# Altium PCB PCB1.PcbDoc (part 2 of 2)
Units mm, origin at the board's own origin, x right, y up, seen from the top; angles counter-clockwise.
Board outline 148.88 x 148.12 mm, 2 copper layers (Top Layer, Bottom Layer); 121 components, 61 nets, 373 pads, 52 vias.
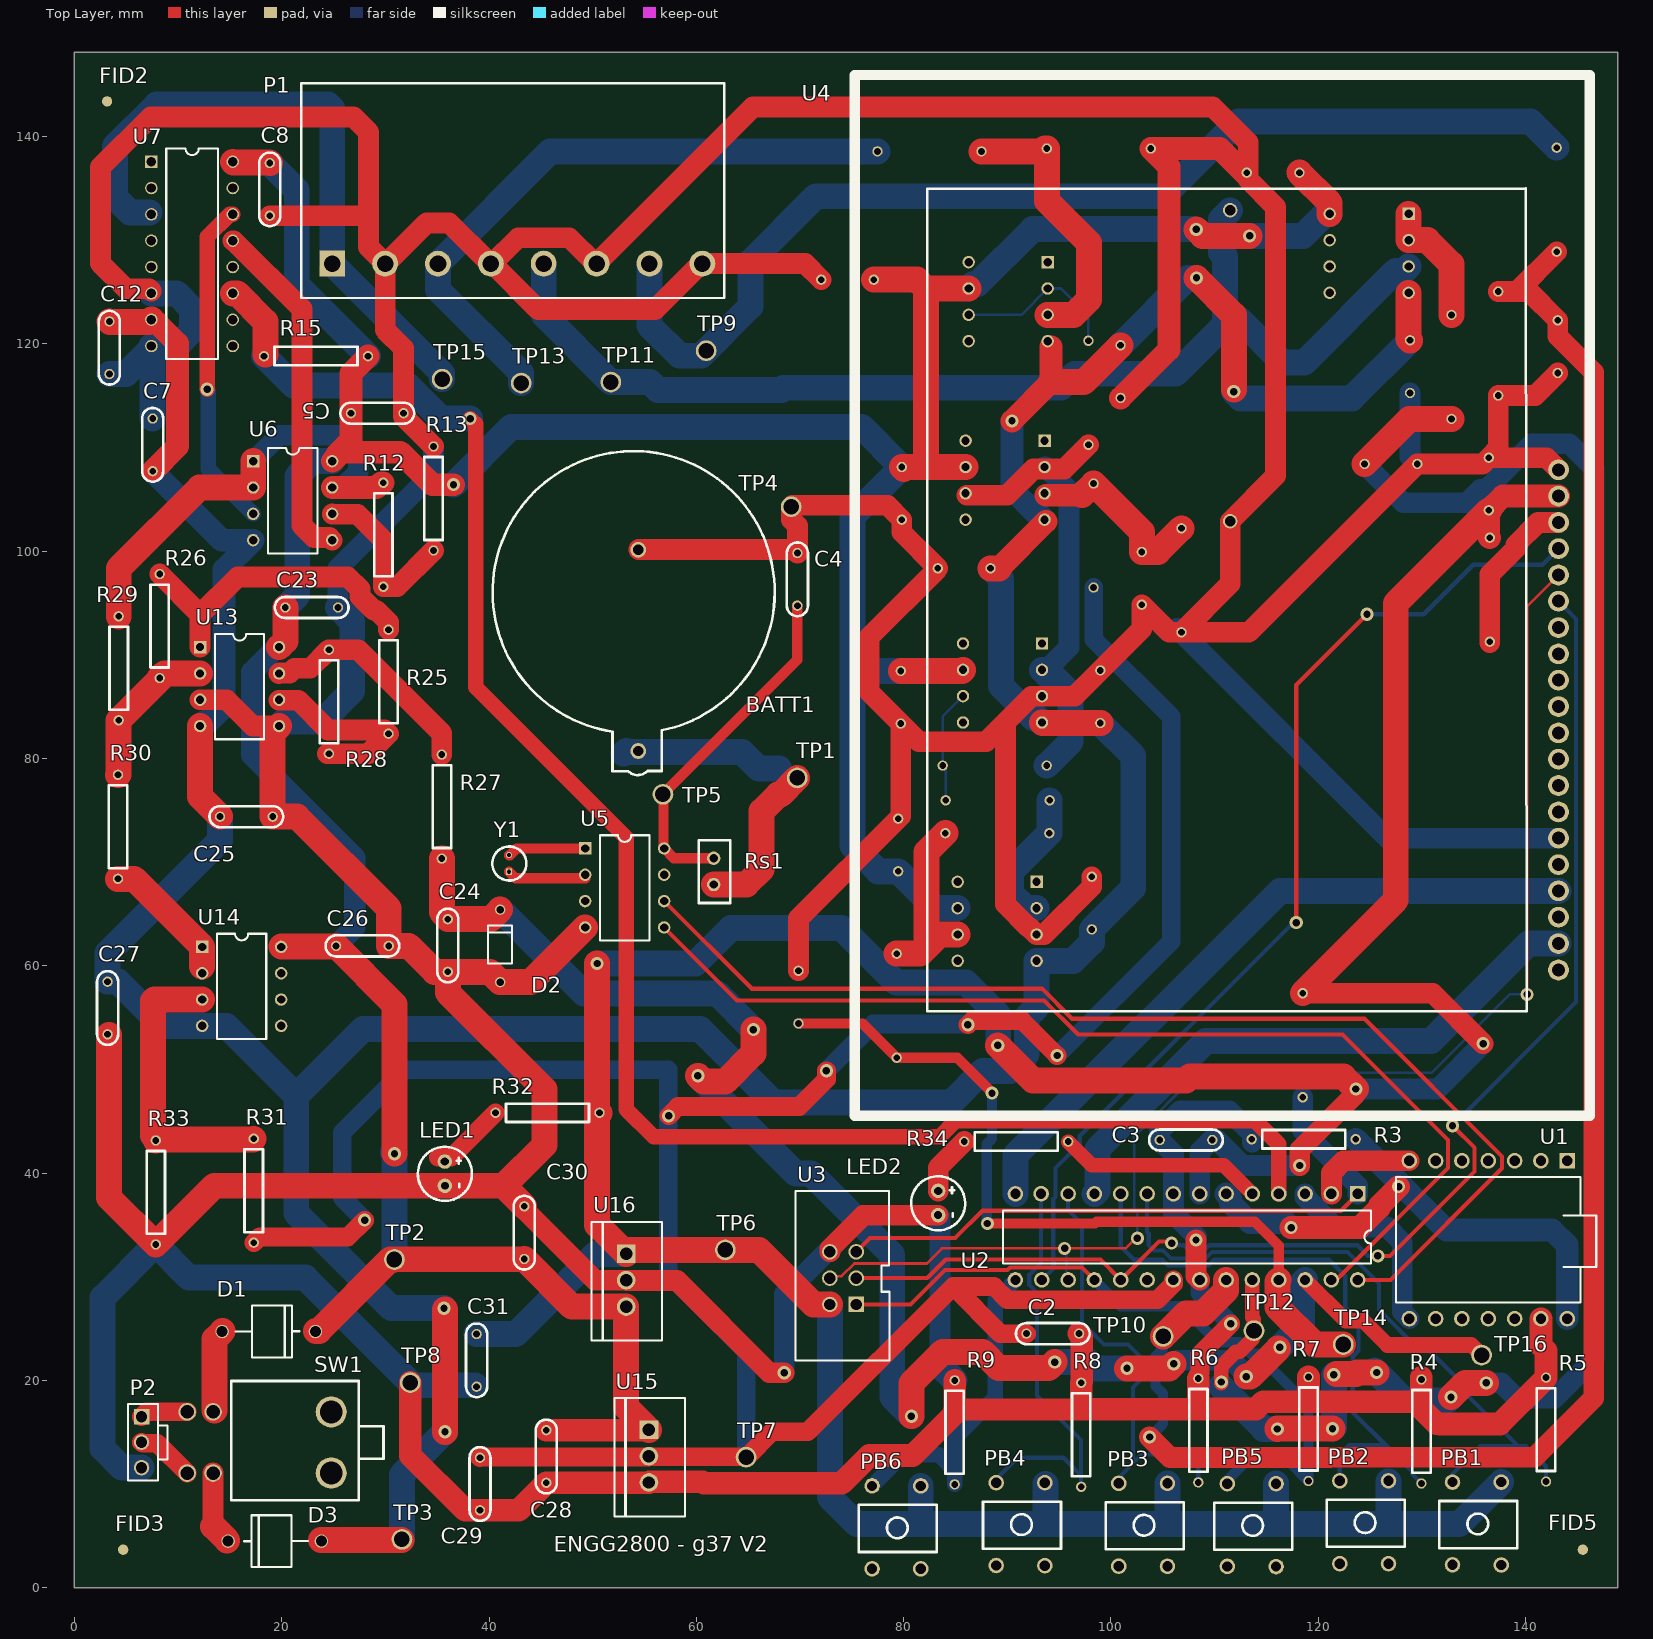
[diagram p0: Top Layer view]

## Part data (continued)
U9 U10 U11 U12: "Operational Amplifier, 1 Func, 2000uV Offset-Max, JFET, PDIP8", Ambient Temperature Range High=70°C, Case/Package=PDIP, Dual Supply Voltage=9V, Input Bias Current=50pA, Input Offset Voltage (Vos)=800µV, Manufacturer="Texas Instruments", Manufacturer Lifecycle Status=ACTIVE, Max Dual Supply Voltage=18V, Min Dual Supply Voltage=3.5V, Min Operating Temperature=0°C, Nominal Supply Current=2mA, Supplier Part Number 1=296-26079-5-ND, Voltage Gain=106.02dB, Bandwidth=3MHz, Category="Amplifiers - Op Amps, Buffer, Instrumentation", Common Mode Rejection Ratio=70dB, ComponentLink1Description=https://octopart.com:443/opatz8j6/c1?t=ME9Kw5m9dXWfcXky85tAcHSyYlC8apoAZ8-3gre8b_nSina7puu2hP8TwWnfTs3EPeSjX34nqyTitdSFLs_8QGBgHX6ww4XlTFDgyVNlqbWD734mBrk3_tKI5cnxKlAKfKpGQ4qpv40VtQydaFuTpCPyxMtPIXymfvkq-wgZ2iYYC59fUWRRvOqwP5ghjkfPHXa6W8o3ZhqP265dUXWWeYnFDnAQeTWHD9G2zSMM2k3qVNsbcUXv1JY2EX9HSKcvO5VCVgy-f0kGF7zpLYVPUm_lO1vQG-OiufpRT80XQYLiZAB9fTbyyp6S8sS6LBfEamcry8ZtT7mRzWiBFXFYfVMsnVtz1ltjCeQae7iXIE2CNjtUpcme9pxYmzJIEchvww&src-supplier=Texas+Instruments, ComponentLink1URL=https://octopart.com:443/opatz8j6/c1?t=ME9Kw5m9dXWfcXky85tAcHSyYlC8apoAZ8-3gre8b_nSina7puu2hP8TwWnfTs3EPeSjX34nqyTitdSFLs_8QGBgHX6ww4XlTFDgyVNlqbWD734mBrk3_tKI5cnxKlAKfKpGQ4qpv40VtQydaFuTpCPyxMtPIXymfvkq-wgZ2iYYC59fUWRRvOqwP5ghjkfPHXa6W8o3ZhqP265dUXWWeYnFDnAQeTWHD9G2zSMM2k3qVNsbcUXv1JY2EX9HSKcvO5VCVgy-f0kGF7zpLYVPUm_lO1vQG-OiufpRT80XQYLiZAB9fTbyyp6S8sS6LBfEamcry8ZtT7mRzWiBFXFYfVMsnVtz1ltjCeQae7iXIE2CNjtUpcme9pxYmzJIEchvww&src-supplier=Texas+Instruments, ComponentLink2Description=https://datasheet.octopart.com:443/LF411CP-Texas-Instruments-datasheet-10255057.pdf?src-supplier=Texas+Instruments, ComponentLink2URL=https://datasheet.octopart.com:443/LF411CP-Texas-Instruments-datasheet-10255057.pdf?src-supplier=Texas+Instruments, ComponentLink3Description=https://sigma.octopart.com:443/49250158/technical_drawing/Texas-Instruments-LF411CP.pdf?src-supplier=Texas+Instruments, ComponentLink3URL=https://sigma.octopart.com:443/49250158/technical_drawing/Texas-Instruments-LF411CP.pdf?src-supplier=Texas+Instruments, ComponentLink4Description=https://datasheet.octopart.com:443/LF411CP-Texas-Instruments-datasheet-152016.pdf?src-supplier=Texas+Instruments, ComponentLink4URL=https://datasheet.octopart.com:443/LF411CP-Texas-Instruments-datasheet-152016.pdf?src-supplier=Texas+Instruments, ComponentLink5Description=https://datasheet.octopart.com:443/LF411CP-Texas-Instruments-datasheet-149597787.pdf?src-supplier=Upverter, ComponentLink5URL=https://datasheet.octopart.com:443/LF411CP-Texas-Instruments-datasheet-149597787.pdf?src-supplier=Upverter, ComponentLink6Description=https://datasheet.octopart.com:443/LF411CP-Texas-Instruments-datasheet-33010185.pdf?src-supplier=Newark, ComponentLink6URL=https://datasheet.octopart.com:443/LF411CP-Texas-Instruments-datasheet-33010185.pdf?src-supplier=Newark, ComponentLink7Description=https://datasheet.octopart.com:443/LF411CP-Texas-Instruments-datasheet-29029183.pdf?src-supplier=Newark, ComponentLink7URL=https://datasheet.octopart.com:443/LF411CP-Texas-Instruments-datasheet-29029183.pdf?src-supplier=Newark, ComponentLink8Description=https://datasheet.octopart.com:443/LF411CP-Texas-Instruments-datasheet-17727392.pdf?src-supplier=Newark, ComponentLink8URL=https://datasheet.octopart.com:443/LF411CP-Texas-Instruments-datasheet-17727392.pdf?src-supplier=Newark, ComponentLink9Description=https://datasheet.octopart.com:443/LF411CP-Texas-Instruments-datasheet-20723.pdf?src-supplier=Newark, ComponentLink9URL=https://datasheet.octopart.com:443/LF411CP-Texas-Instruments-datasheet-20723.pdf?src-supplier=Newark, ComponentLink10Description=https://datasheet.octopart.com:443/LF411CP-Texas-Instruments-datasheet-8787176.pdf?src-supplier=Verical, ComponentLink10URL=https://datasheet.octopart.com:443/LF411CP-Texas-Instruments-datasheet-8787176.pdf?src-supplier=Verical, ComponentLink11Description=https://datasheet.octopart.com:443/LF411CP-Texas-Instruments-datasheet-8639286.pdf?src-supplier=element14, ComponentLink11URL=https://datasheet.octopart.com:443/LF411CP-Texas-Instruments-datasheet-8639286.pdf?src-supplier=element14, ComponentLink12Description=https://datasheet.octopart.com:443/LF411CP-Texas-Instruments-datasheet-5316506.pdf?src-supplier=element14, ComponentLink12URL=https://datasheet.octopart.com:443/LF411CP-Texas-Instruments-datasheet-5316506.pdf?src-supplier=element14, ComponentLink13Description=https://datasheet.octopart.com:443/LF411CP-Texas-Instruments-datasheet-166161800.pdf?src-supplier=LCSC, ComponentLink13URL=https://datasheet.octopart.com:443/LF411CP-Texas-Instruments-datasheet-166161800.pdf?src-supplier=LCSC, ComponentLink14Description=https://datasheet.octopart.com:443/LF411CP-Texas-Instruments-datasheet-14138788.pdf?src-supplier=iiiC, ComponentLink14URL=https://datasheet.octopart.com:443/LF411CP-Texas-Instruments-datasheet-14138788.pdf?src-supplier=iiiC, ComponentLink15Description=https://datasheet.octopart.com:443/LF411CP-Texas-Instruments-datasheet-124340.pdf?src-supplier=DigiKey, ComponentLink15URL=https://datasheet.octopart.com:443/LF411CP-Texas-Instruments-datasheet-124340.pdf?src-supplier=DigiKey, ComponentLink16Description=https://datasheet.octopart.com:443/LF411CP-Texas-Instruments-datasheet-114211.pdf?src-supplier=Sierra+IC, ComponentLink16URL=https://datasheet.octopart.com:443/LF411CP-Texas-Instruments-datasheet-114211.pdf?src-supplier=Sierra+IC, ComponentLink17Description=http://sigma.octopart.com:80/reach_statement/Texas-Instruments-company-64.pdf?src-supplier=Compliance+Statements, ComponentLink17URL=http://sigma.octopart.com:80/reach_statement/Texas-Instruments-company-64.pdf?src-supplier=Compliance+Statements, ComponentLink18Description=http://sigma.octopart.com:80/conflict_mineral_statement/Texas-Instruments-company-63.pdf?src-supplier=Compliance+Statements, ComponentLink18URL=http://sigma.octopart.com:80/conflict_mineral_statement/Texas-Instruments-company-63.pdf?src-supplier=Compliance+Statements, Gain Bandwidth Product=3MHz, Height=5.08mm, Lead Free="Lead Free", Length=9.81mm, Lifecycle Status=Production, Manufacturer Part Number=LF411CP, Max Operating Temperature=70°C, Max Supply Voltage=18V, Min Supply Voltage=3.5V, Mount="Through Hole", Number of Amplifiers=1, Number of Channels=1, Number of Circuits=1, Number of Elements=1, Number of Pins=8, Operating Supply Current=2mA, Operating Supply Voltage=18V, Packaging=Rail/Tube, Pricing 1="1=1.89, 10=1.392, 50=1.1922, 100=1.1302, 250=1.06472, 500=1.02526, 1000=0.99277, 2500=0.95848, 5000=0.93781 (USD)", Radiation Hardening=No, REACH SVHC=No, RoHS=Compliant, Schedule B="8542330000, 8542330000|8542330000|8542330000|8542330000|8542330000", Slew Rate=13V/µs, Stock 1=1651, Supplier 1=DigiKey, Thickness=3.9mm, Width=6.35mm
U15: library part "3.3V regulator"
U16: library part "5V Regulator"

## Via types
v1: diameter 1.27, hole 0.711, Top Layer to Bottom Layer, 52 vias

## Nets (pads, with @x,y where several pads share a name; then routed paths per layer and width w, separated by ;. In a path a pad name is that pad's centre, name@x,y a point inside that pad or via, vN(x,y) a via of type N, cw(c..) or ccw(c..) an arc to the next point about the centre after c; other vN are vias at no path point)
+3.3: C2.1 C29.2 R23.1 R31.1 TP7.1 U2.21 U15.3 | length 275.7
  Top Layer w1.8: R31.1 17.858,33.85 26.375,33.85 v1(28,35.475) ; C29.2 39.197,12.628 55.353,12.628 U15.3 55.475,12.65 64.75,12.65 TP7.1 64.854,12.6 67.304,15.05 70.753,15.05 84.778,29.075 88.717,29.075 89.996,27.796 104.492,27.796 106.025,29.329 U2.21 ; v1(57.325,45.525) 58.234,46.434 69.934,46.434 72.55,49.05 v1(72.55,49.875) ; 84.739,29.036 84.817,29.036 89.328,24.525 C2.1 ; v1(86.2,54.325) 86.604,54.729 91.421,54.729 v1(94.8,51.35)
  Bottom Layer w1.8: v1(28,35.475) 25.85,37.625 25.85,43.925 31.9,49.975 57.275,49.975 57.275,30.325 64.8,22.8 TP7.1 ; v1(72.55,49.875) 77.075,54.4 v1@86.2,54.4 ; v1(94.8,51.35) 105.8,62.35 105.8,84.019 98.325,91.494 R23.1
+5: C1.1 C3.1 C31.2 PB1.1 PB2.1 PB3.1 PB4.1 PB5.1 PB6.1 R1.1 R2.1 R32.1 TP6.1 U2.7 U3.6 U4.19 U16.3 | length 379.7
  Top Layer w2: v1(118.204,40.746) 118.204,42.254 123.625,47.675 v1(123.625,48.125) ; R1.1 131.042,57.358 v1(135.9,52.5)
  Top Layer w2.2: R2.1 136.45,101.408 C1.1 137.825,105.32 U4.19
  Top Layer w2.5: R32.1@50.425,45.825 50.425,35.015 U16.3 53.61,32.6 TP6.1 66.025,32.6 71.29,27.335 U3.6 ; v1(50.425,60.225) 50.425,46.058 R32.1 ; v1(89.075,52.325) 92.454,48.946 107.246,48.946 107.629,49.329 122.421,49.329 v1(123.625,48.125) ; R1.1 127.475,66.333 127.475,94.97 C1.1
  Bottom Layer w2: U2.7 108.565,42.09 C3.1@109.725,43.25 ; C3.1 110.237,43.2 112.691,40.746 v1(118.204,40.746) v1@118.225,40.725 ; v1(123.625,48.125) 131.525,48.125 v1(135.9,52.5)
  Bottom Layer w2.5: C31.2 42.58,24.48 50.315,32.215 U16.3 ; v1(50.425,60.225) 59.901,60.225 63.326,63.65 74.016,63.65 79.285,58.381 86.019,58.381 89.125,55.275 v1@89.125,52.618 ; U3.6 72.885,8.742 75.475,6.152 81.501,6.152 ; PB6.1 81.65,6.3 81.501,6.152 ; PB4.1@93.7,10.002 93.7,6.152 ; PB3.1 105.45,6.177 105.475,6.152 ; PB5.1 115.925,6.152 ; PB2.1@126.775,10.277 126.775,6.152 ; PB1.1 133.6,6.152 126.775,6.152 ; 81.501,6.152 93.7,6.152 ; 93.7,6.152 105.475,6.152 ; 105.475,6.152 115.925,6.152 ; 115.925,6.152 126.775,6.152
+10: C5.1 C8.1 C9.1 C13.1 C14.1 C16.1 C20.1 C23.2 C26.1 C28.2 C30.2 D1.2 R15.2 TP2.1 U6.8 U7.16 U8.8 U9.7 U10.7 U11.7 U12.7 U13.8 U14.8 U15.1 U16.1 | length 387
  Top Layer w0.254: U14.8 U14.8@19.993,61.878 ; C26.1@25.198,61.878 C26.1
  Top Layer w2.2: U6.8 25.73,109.55 31.425,109.55 34.55,106.425 v1(36.575,106.425) ; 25.3,109.325 26.675,110.7 C5.1 26.675,117.175 R15.2 ; C28.2 U15.1@55.39,15.205
  Top Layer w2.5: U7.16 15.34,137.515 18.785,137.515 C8.1 ; U13.8 20.35,91.36 C23.2 ; U14.8@19.993,61.878 C26.1@25.198,61.878 ; D1.2@23.3,24.775 23.583,24.775 30.483,31.675 TP2.1 30.9,31.7 43.375,31.7 C30.2 47.99,27.135 U16.1 53.225,17.44 U15.1 ; C26.1 30.875,56.295 v1(30.875,41.875) ; C13.1 81.275,126.2 82.125,125.35 ; C16.1 85.62,88.455 U10.7 ; C20.1 C20.1@80.01,107.94 ; C20.1@79.885,108.125 82.15,108.125 ; U12.7 82.15,108.125 ; U9.7 82.3,125.35 82.15,125.2 82.15,108.125 ; v1(108.225,131.05) 108.85,130.425 v1(113.375,130.425) ; C9.1 121.1,133.605 U8.8
  Bottom Layer w2.1: U13.8 19.522,90.755 17.141,88.374 17.141,80.334 27.05,70.425 27.05,63.73 C26.1
  Bottom Layer w2.5: C8.1 21.45,134.85 21.45,125.7 R15.2 ; C23.2 21.5,95.725 21.5,107.226 22.964,108.69 U6.8 ; v1@30.75,42 v1(30.875,41.875) TP2.1 ; v1(36.575,106.425) 42.15,112 75.95,112 C20.1 75.05,103.35 75.05,88.625 ; C16.1 75.22,88.455 75.05,88.625 ; U11.7 83.03,65.565 C14.1 77.53,69.12 75.05,71.6 75.05,88.625 ; U9.7 86.711,125.786 87.147,125.786 92.436,131.075 v1@107.825,131.075 ; v1(113.375,130.425) 118.534,130.425 120.664,132.555 U8.8
+10V: P2.1 SW1.1 | length 4.6
  Top Layer w1.8: P2.1 6.95,16.975 SW1.1
-10: C7.2 C11.1 C12.2 C15.2 C17.2 C21.2 C22.2 C25.2 C27.2 D3.1 TP3.1 U6.4 U7.7 U8.4 U9.4 U10.4 U11.4 U12.4 U13.4 U14.4 | length 389.9
  Top Layer w0.254: D3.1 D3.1@23.875,4.55 ; TP3.1@31.55,4.625 TP3.1 ; v1@35.55,27.075 v1(35.65,26.975) v1@35.75,26.875
  Top Layer w2.2: U7.7 7.64,122.125 7.863,122.125 9.95,120.038 9.95,110.125 C7.2 ; 89.21,98.35 U12.4@93.72,102.86 ; v1(90.45,112.575) 94.2,116.325 94.2,119.725
  Top Layer w2.5: C12.2 3.425,122.125 7.21,122.125 U7.7 ; U13.4 12.125,76.325 C25.2 ; D3.1@23.775,4.625 TP3.1@31.55,4.625 ; v1(35.75,15.05) v1@35.75,26.875 ; C22.2 89.21,98.35 ; U10.4 93.4,83.425 C17.2 ; 94.2,116.325 97.375,116.325 C15.2 ; v1(108.25,126.375) 111.85,122.775 v1@111.85,115.625 ; U8.4 128.72,120.48 C11.1
  Bottom Layer w2.2: C7.2 14.205,101.07 U6.4 14.425,98.245 14.425,84.999 12.997,83.571 12.561,83.571 U13.4 ; v1(90.45,112.575) 90.45,105.967 92.786,103.631 93.009,103.631 U12.4
  Bottom Layer w2.5: C25.2 14.05,72.1 3.2,61.25 C27.2 4.225,58.475 8.49,54.21 U14.4 14.665,54.21 21.404,47.471 ; TP3.1 31.6,10.9 v1(35.75,15.05) ; v1(35.65,26.975) 30.575,26.975 21.404,36.146 21.404,47.471 ; C22.2 89.4,97.33 89.4,86.989 92.473,83.916 92.909,83.916 U10.4 ; C17.2 102.15,80.25 102.15,67.52 C21.2 98.15,62.275 96.36,60.485 U11.4 92.825,56.025 91.879,55.079 91.879,51.477 90.266,49.864 87.639,49.864 84.575,46.8 67.475,46.8 60.35,53.925 27.859,53.925 21.404,47.471 ; C15.2 107.425,126.375 v1(108.25,126.375) ; v1(111.85,115.4) 112.5,114.75 123.25,114.75 C11.1
-10V: P2.2 SW1.3 | length 5.6
  Top Layer w1.8: P2.2 6.572,13.953 7.997,13.953 SW1.3
AC_Current: P1.1 TP15.1 U7.3 | length 62.2
  Bottom Layer w2.5: U7.3@7.25,132.675 5.364,132.675 3.9,134.139 3.9,139.075 7.925,143.1 24.475,143.1 24.875,142.7 P1.1 35.475,117.15 TP15.1
AC_Current_Bias: R12.2 R29.1 U6.1 U6.2 U6.7 | length 45.5
  Top Layer w2.2: U6.7 29.14,106.15 29.598,106.608 R12.2
  Top Layer w2.5: R29.1 4.275,98.35 12.075,106.15 U6.2 U6.1
  Bottom Layer w2: U6.1 19.754,111.194 25.907,111.194 27.374,109.727 27.374,107.653 25.871,106.15 U6.7
AC_Current_CTRL: R15.1 U2.4 U7.11 | length 173.2
  Top Layer w1.5: v1(38.175,112.8) 38.7,112.275 38.7,86.9 53.225,72.375 53.225,46.175 55.9,43.5 83.458,43.5 85.012,45.054 113.923,45.054 116.185,42.792 U2.4
  Top Layer w2.5: U7.11 15.711,124.88 18.43,122.161 R15.1@18.43,118.963
  Bottom Layer w2.5: R15.1 21.117,116 32.18,116 35.38,112.8 v1(38.175,112.8)
AC_Current_Out: C24.2 D2.2 R27.2 TP16.1 U2.26 | length 162.4
  Top Layer w1.5: U2.26 122.65,25.775 124.328,25.775 126.678,23.425 134.775,23.425 TP16.1
  Top Layer w2.5: R27.2 35.45,65.176 36.025,64.601 C24.2 40.155,64.505 D2.2 ; v1(60.15,49.4) 60.712,48.838 62.783,48.838 65.5,51.555 v1(65.5,53.85) ; v1(80.75,16.55) 80.75,19.729 83.784,22.764 87.612,22.764 89.175,21.2 94,21.2 v1(94.575,21.775) ; v1(101.55,21.175) 105.625,21.175 v1(106.05,21.6) ; v1(113.05,20.375) 113.425,20.375 v1@116.125,23.075
  Bottom Layer w2: v1(106.05,21.6) 106.406,21.956 109.564,21.956 109.567,21.953 111.636,21.953 v1@113.014,20.575
  Bottom Layer w2.5: D2.2 49.15,57.35 62,57.35 v1(65.5,53.85) ; v1(60.15,49.4) 69.599,39.951 71.076,39.951 78.9,32.128 78.9,18.4 v1(80.75,16.55) ; v1(94.575,21.775) 96.289,21.775 96.295,21.781 97.955,21.781 98.561,21.175 v1(101.55,21.175) ; v1(116.3,23.2) 118.439,25.339 118.439,29.414 U2.26
AC_Voltage: P1.3 R16.1 TP13.1 | length 61.7
  Bottom Layer w2.5: TP13.1 43.1,117.225 35.075,125.25 P1.3 45.9,138.575 R16.1
AC_Voltage_Out: C18.2 R22.2 TP14.1 U2.25 | length 75.9
  Top Layer w1: C18.2 76.022,54.445 R22.2 85.158,51.142 v1@88.3,48 ; v1(88.075,35.15) 98.46,35.15 98.614,35.304 113.871,35.304 116.185,32.99 U2.25@116.185,30.336
  Top Layer w2.5: U2.25 116.049,29.564 116.049,27.076 119.65,23.475 TP14.1
  Bottom Layer w1: v1@88.075,35.475 88.031,35.519 88.031,42.851 88.525,43.345 v1(88.525,47.725)
Backlight_Anode: U2.11 U4.2 | length 57.1
  Bottom Layer w2.5: U2.11 98.691,38.286 98.691,42.301 109.13,52.74 130.865,52.74 140.275,62.15 U4.2
Clock: U2.19 U3.2 U4.15 | length 128.8
  Top Layer w0.4: U3.2 82.275,29.875 84.061,31.661 98.984,31.661 U2.19 104.645,33.4 v1@105.975,33.4 ; v1(125.75,32.025) 126.925,32.025 135.064,40.164 135.064,42.461 v1(132.95,44.575)
  Bottom Layer w0.4: v1(105.85,33.25) 106.016,33.084 106.486,33.084 106.519,33.05 107.019,33.05 107.111,32.958 107.648,32.421 108.852,32.421 109.389,32.958 109.481,33.05 123.775,33.05 124.8,32.025 v1(125.75,32.025) ; v1(132.95,44.575) 144.879,56.504 144.879,93.476 U4.15
DC_Current: P1.5 Rs2.1 TP11.1 U8.3 | length 111.3
  Bottom Layer w2.5: P1.5 45.275,122.8 TP11.1 55.531,116.325 56.306,115.55 68.2,115.55 68.425,115.775 95.175,115.775 96.521,117.121 106.246,117.121 111.5,122.375 112.4,122.375 116.577,118.198 118.648,118.198 127.489,127.039 128.284,127.039 U8.3 ; 111,121.875 111,123.275 111.004,123.279 111.004,128.436 110.621,128.819 110.621,132.021 Rs2.1
DC_Current_Out: C10.2 R14.1 TP12.1 U2.24 | length 181.6
  Top Layer w1.4: v1@110.65,19.717 110.65,21.375 112.054,22.779 112.429,22.779 113.682,24.032 113.682,24.693 TP12.1 113.797,25.929 113.645,26.08 U2.24
  Top Layer w2.5: v1(116.05,15.325) 116.075,15.35 v1(121.375,15.35) ; v1@121.775,20.625 123.625,20.625 123.775,20.775 v1(125.625,20.775) ; C10.2 128.812,112.767 R14.1 ; v1(132.8,18.4) 134.175,19.775 v1(136.2,19.775)
  Bottom Layer w2: C10.2 128.22,104.675 134.346,104.675 135.62,105.949 136.208,105.949 140.623,110.364 144.222,110.364 146.625,107.961 146.625,22.099 142.805,18.279 139.121,18.279 137.625,19.775 v1(136.2,19.775)
  Bottom Layer w2.5: v1@110.599,19.449 114.723,15.325 v1(116.05,15.325) ; v1(121.375,15.35) 121.5,15.475 v1(121.5,20.55) ; v1@125.448,20.952 v1(125.625,20.775) 128.302,18.098 132.498,18.098 v1(132.8,18.4)
  other v1: 110.65,19.85
DC_Current_Out_Screw: BATT1.2 C1.2 C2.2 C3.2 C4.2 C5.2 C6.2 C7.1 C8.2 C9.2 C10.1 C11.2 C12.1 C13.2 C14.2 C15.1 C16.2 C17.1 C18.1 C19.1 C20.2 C21.1 C22.1 C23.1 C24.1 C25.1 C26.2 C27.1 C28.1 C29.1 C30.1 C31.1 D2.1 LED1.2 LED2.2 P1.2 P1.4 P1.6 P1.8 P2.3 R3.1 R4.1 R5.1 R6.1 R7.1 R8.1 R9.1 R10.2 R13.1 R17.2 R24.1 R33.1 Rs2.2 TP4.1 TP8.1 U1.13 U2.8 U2.22 U3.4 U4.6 U4.20 U5.4 U7.6 U7.8 U10.3 U11.3 U13.3 U13.5 U15.2 U16.2 | length 1099.4
  Top Layer w1.8: R6.1 108.425,20.575 108.592,20.742 108.592,22.517 v1(111.55,25.475)
  Top Layer w2: U7.6@7.425,125.1 7.209,125.316 4.984,125.316 2.525,127.775 2.525,137.068 7.357,141.9 26.915,141.9 28.379,140.436 28.379,132.209 ; U13.3 14.665,85.675 17.205,83.135 U13.5 ; C8.2 28.218,132.37 28.379,132.209 ; R13.1 31.755,113.003 C5.2 31.755,119.58 29.975,121.36 P1.2 ; C30.1 43.4,36.5 50.225,29.675 U16.2 53.261,29.639 58.136,29.639 67.025,20.75 v1(68.475,20.75) ; BATT1.2@54.432,100.167 69.413,100.167 C4.2 69.75,102.456 69.15,103.056 TP4.1 69.281,104.431 78.439,104.431 C20.2 79.825,101.825 C22.1 76.675,91.725 76.675,86.425 C16.2 ; C18.1 69.85,64.575 C14.2 79.725,74.45 C16.2 ; C13.2 70.495,127.75 P1.8 60.44,127.75 56.015,123.325 44.735,123.325 P1.4@40.31,127.75 ; U3.4 72.885,32.709 76.126,35.95 LED2.2 ; 89.825,83.501 89.825,65.943 92.057,63.711 92.139,63.711 U11.3 93.55,63.025 98.15,67.625 C21.1 ; v1(108.2,33.55) 108.2,30.065 U2.22 ; C6.2 140.925,115.025 R10.2 137.35,109.925 C1.2 ; U4.20 142.02,109.025 C1.2 ; 28.379,132.209 28.379,129.346 P1.2 ; P1.2 30.056,127.75 33.981,131.675 36.169,131.675 40.094,127.75 P1.4 P1.4@40.31,127.75 ; P1.4@40.31,127.75 42.814,130.254 47.736,130.254 50.24,127.75 P1.6 65.475,142.85 109.824,142.85 113.25,139.424 113.25,136.2 113.25,135.85 115.879,133.221 115.879,107.279 Rs2.2 111.5,96.875 R24.1 ; C16.2 81.474,81.626 87.95,81.626 92.344,86.02 U10.3 96.49,86.02 C17.1 102.975,92.505 C19.1 105.65,92.175 R24.1 ; R24.1 113.3,92.175 C10.1 135.85,108.425 C1.2
  Top Layer w2.2: TP8.1 32.4,12.775 37.7,7.475 C29.1 42.875,7.475 C28.1 45.542,10.142 55.407,10.142 U15.2 55.489,10.223 60.599,10.223 60.727,10.096 74.032,10.096 76.688,12.753 80.847,12.753 84.9,16.805 84.9,17.185 ; R9.1 84.925,17.21 84.9,17.185 ; C2.2 97.179,24.271 97.179,19.831 R8.1 97.125,17.25 97.1,17.225 ; C15.1 105.6,119.47 105.6,137.1 R17.2 110.495,138.85 C9.2@113.145,136.2 ; R6.1 108.425,17.287 108.4,17.262 ; R7.1 119.05,17.954 ; R4.1@129.925,20.31 129.925,17.791 ; U1.13 141.48,23.369 141.975,22.874 R5.1 ; R5.1@141.95,20.227 137.519,15.796 131.721,15.796 131.696,15.821 131.412,15.821 129.9,17.333 129.925,17.358 129.925,17.791 ; 84.9,17.185 97.1,17.225 ; 97.1,17.225 108.4,17.262 ; 108.4,17.262 113.995,17.262 114.687,17.954 119.05,17.954 ; 119.05,17.954 129.762,17.954 129.925,17.791
  Top Layer w2.5: C27.1@3.32,53.325 3.32,37.655 R33.1 13.51,38.785 LED1.2 41.42,38.785 ; U13.5 19.13,82.52 C25.1 21.475,74.4 30.325,65.55 C26.2 32.25,61.925 34.75,59.425 C24.1 ; C30.1 41.42,38.785 ; U5.4 43.99,58.425 D2.1 40.075,59.425 C24.1 ; C24.1 36.025,57.425 45.35,48.1 45.35,42.715 41.42,38.785
  Bottom Layer w0.254: TP8.1 TP8.1@32.657,19.543 ; C31.1@38.657,19.543 C31.1
  Bottom Layer w1.8: U2.22 108.565,28.46 v1(111.55,25.475)
  Bottom Layer w2: C23.1 25.43,98.355 34.071,106.996 34.071,107.462 34.65,108.041 R13.1 ; v1(68.475,20.75) 68.475,28.299 72.591,32.415 U3.4 ; LED2.2 83.504,35.771 83.504,21.61 ; 106.394,92.581 R24.1 126.655,72.32 U4.6 ; v1@108.25,33.875 106.025,36.1 U2.8 106.025,41.87 C3.2 104.645,43.25 104.645,43.995 106.65,46 111.4,46 113.625,43.775 R3.1@113.625,43 ; C11.2 128.85,109.125 C10.1
  Bottom Layer w2.5: C12.1 4.97,117.095 U7.8@7.425,119.55 ; P2.3 4.564,11.6 2.725,13.439 2.725,28 R33.1 11.05,29.925 22.275,29.925 TP8.1 ; U7.6 9.861,124.88 11.325,123.416 11.325,121.264 9.861,119.8 U7.8 7.55,119.675 C7.1 ; U13.5 20.181,83.571 23.846,83.571 26.8,86.525 26.8,93.205 C23.1 ; TP8.1@32.657,19.543 C31.1@38.657,19.543 ; 83.504,21.61 83.504,21.431 R9.1
DC_Voltage: P1.7 R11.2 TP9.1 | length 107.7
  Bottom Layer w2.5: P1.7 55.475,121.775 58.389,118.861 60.461,118.861 65.225,123.625 65.225,127.95 71.528,134.253 105.053,134.253 112.275,141.475 140.458,141.475 R11.2
DC_Voltage_Out: C6.1 R10.1 R11.1 TP10.1 U2.23 | length 182.5
  Top Layer w2: v1(103.725,14.55) 105.704,12.571 121.132,12.571 121.157,12.596 140.857,12.596 146.575,18.314 146.575,117.266 143.1,120.741 C6.1 140.322,125.058 R10.1 ; 139.158,125.058 R11.1
  Top Layer w2.5: TP10.1 107.231,26.456 108.863,26.456 111.105,28.699 U2.23
  Bottom Layer w1: v1(103.725,14.55) 105.025,15.85 105.025,18.724 104.296,19.453 104.296,22.327 105.025,23.056 105.025,23.153
Display_CTRL_1: PB1.2 R5.2 U2.9 | length 64.3
  Bottom Layer w0.4: U2.9 103.485,34.33 103.639,34.176 103.639,33.086 104.175,32.55 105.01,32.55 105.793,31.767 109.123,31.767 109.752,32.396 122.812,32.396 125.854,29.354 125.854,26.83 129.716,22.968 130.642,22.968 134.504,19.106 134.504,18.471 139.325,13.65 ; PB1.2 132.95,11 135.6,13.65 139.325,13.65 ; R5.2 141.975,11.725 140.05,13.65 139.325,13.65
Display_CTRL_2: PB2.2 R4.2 U2.10 | length 59.2
  Bottom Layer w0.4: U2.10 100.945,32.93 102.225,31.65 104.985,31.65 105.522,31.113 109.394,31.113 109.931,31.65 121.018,31.65 122.601,30.067 122.601,27.101 123.864,25.838 123.864,22.873 123.325,22.334 123.325,16.931 126.506,13.75 ; PB2.2 122.075,12.857 122.968,13.75 126.506,13.75 ; R4.2 129.041,10.978 129.041,11.215 126.506,13.75
Display_CTRL_3: PB3.2 R6.2 U2.12 | length 42.4
  Bottom Layer w0.4: U2.12@95.865,38.284 95.865,36.435 97.201,35.099 97.201,25.598 99.315,23.485 101.65,23.485 103.254,21.881 103.254,20.469 102.125,19.34 102.125,12.025 ; PB3.2@100.846,10.106 100.846,10.308 101,10.462 101,10.9 102.125,12.025 ; R6.2 108.425,11.875 107.423,12.877 102.977,12.877 102.125,12.025
Display_CTRL_4: PB4.2 R8.2 U2.13 | length 40.9
  Bottom Layer w0.4: PB4.2 88.925,10.277 89.175,10.527 89.175,10.725 90.998,12.548 95.402,12.548 97.125,10.825 ; U2.13 93.255,31.333 92.121,30.199 92.121,29.201 92.871,28.451 92.871,18.529 97.125,14.275 97.125,10.825 ; R8.2 97.125,10.825
Display_CTRL_5: PB5.2 R7.2 U2.18 U3.1 | length 67.6
  Top Layer w0.4: U3.1 80.66,27.335 83.975,30.65 90.032,30.65 90.286,30.904 97.201,30.904 U2.18
  Bottom Layer w1: U2.18 100.955,27.15 106.85,27.15 110.293,23.707 112.363,23.707 113.49,22.579 114.08,22.579 119.05,17.609 R7.2 117.127,12.225 113.075,12.225 111.225,10.375 PB5.2
Display_CTRL_6: PB6.2 R9.2 U2.15 | length 32
  Bottom Layer w1.5: PB6.2 79.948,12.825 83.4,12.825 84.925,11.3 ; R9.2 84.925,11.3 ; U2.15 88.825,27.74 88.825,18.35 84.925,14.45 84.925,11.3
Encoder_RESET: R1.2 U2.1 U3.3 | length 62.2
  Top Layer w0.4: U3.3 76.76,33.75 84.972,33.75 87.597,36.375 122.18,36.375 U2.1
  Bottom Layer w2: R1.2 118.5,44.1 123.805,38.795 U2.1
Instruction_Code: U2.16 U4.17 | length 98.4
  Top Layer w0.4: v1(117.875,64.175) 117.875,87.1 v1(124.7,93.925)
  Bottom Layer w0.4: U2.16 94.436,30.811 94.436,37.498 94.661,37.723 94.661,40.487 96.987,42.813 96.987,43.587 v1@117.7,64.3 ; v1(124.7,93.925) 130.175,93.925 134.95,98.7 141.635,98.7 U4.17
MCU_MOSI: U2.17 U3.5 U4.16 | length 129.9
  Top Layer w0.254: U3.5 73.075,30.065 74.016,30.065 75.235,31.284 82.234,31.284 83.7,32.75 v1(95.525,32.75) 101.4,32.75 v1@102.825,34.175 ; v1(140.15,57.25) 140.15,94.685 U4.16
  Bottom Layer w0.254: v1(95.525,32.75) 95.695,32.58 95.695,29.87 U2.17 ; v1(102.55,33.725) 102.55,36.136 102.25,36.436 102.25,43.553 108.372,49.675 130.9,49.675 138.5,57.275 v1@139.9,57.275
Measurement_LED: R34.1 U2.5 | length 19.9
  Top Layer w1.4: R34.1 98.15,40.775 110.87,40.775 U2.5
NetBATT1_1: BATT1.1 Rs1.2 TP1.1 | length 31.2
  Top Layer w2.5: Rs1.2 64.836,67.85 66.3,69.314 66.3,74.936 67.885,76.521 68.121,76.521 TP1.1
  Bottom Layer w2.5: 52.975,80.49 53.235,80.75 ; 53.41,80.65 54.3,80.65 64.4,80.65 66.025,79.025 68,79.025
NetC4_1: C4.1 Rs1.1 TP5.1 U5.8 | length 34
  Top Layer w1: Rs1.1 57.835,70.39 U5.8 56.835,71.39 56.835,76.49 TP5.1 69.75,89.525 C4.1
NetC19_2: C19.2 R23.2 R24.2 U12.3 | length 18.4
  Top Layer w2.2: U12.3@93.72,105.4 97.192,105.4
  Top Layer w2.5: 97.192,105.4 R23.2 102.975,101.883 C19.2 104.522,99.93 R24.2
NetD1_1: D1.1 SW1.2 | length 8
  Top Layer w2.5: SW1.2@13.525,17.125 13.525,24 D1.1 D1.1@14.3,24.775
NetD3_2: D3.2 SW1.4 | length 7.1
  Top Layer w2: 13.375,5.925 SW1.4
  Top Layer w2.5: 13.375,5.925 D3.2@14.725,4.575
NetLED1_1: LED1.1 R32.2 | length 7.3
  Top Layer w1.778: 35.075,41.525 36.325,41.525 R32.2
NetLED2_1: LED2.1 R34.2 | length 5.8
  Top Layer w2: LED2.1 83.325,40.533 R34.2
NetR2_2: R2.2 U4.18 | length 15.5
  Top Layer w2: R2.2@136.55,91.2 R2.2 136.55,97.767 139.054,100.271 139.054,100.629 141.205,102.78 U4.18
NetR12_1: R12.1 R13.2 U6.6 | length 16.8
  Top Layer w2: U6.6 24.901,103.579 27.321,103.579 29.8,101.1 R12.1 31.15,96.575 R13.2
NetR14_2: R14.2 U8.1 U8.2 | length 12.5
  Top Layer w2.5: U8.1 U8.2 130.535,130.015 132.85,127.7 132.85,124.732 R14.2
NetR16_2: R16.2 R17.1 U9.3 | length 27.3
  Top Layer w2.5: R16.2 93.34,138.575 93.615,138.85 R17.1 93.817,133.808 97.875,129.75 97.875,124.274 96.411,122.81 U9.3
NetR18_1: R18.1 R20.2 U10.2 U12.2 U12.6 | length 47.2
  Top Layer w2: U12.6@86.1,105.4 89.973,105.4 92.513,107.94 95.49,107.94 R20.2
  Bottom Layer w2: U10.2 93.778,88.56 95.949,90.731 95.949,105.853 93.677,108.125 U12.2
  Bottom Layer w2.5: U10.2 93.781,88.124 94.217,88.124 96.099,86.242 96.099,81.624 R18.1
NetR18_2: R18.2 R21.1 U10.6 | length 11
  Bottom Layer w0.254: R21.1 84.05,78.84 83.767,79.123 R18.2 83.767,84.062 U10.6
NetR19_1: R19.1 R21.2 U11.2 | length 13.6
  Bottom Layer w2.5: U11.2 91.815,65.565 90.351,67.029 90.351,69.101 94.066,72.816 94.066,75.958 R21.2
NetR19_2: R19.2 R22.1 U11.6 | length 18.4
  Top Layer w2.5: R22.1 81.6,61.175 83.45,63.025 U11.6 ; 82.2,61.775 82.2,70.983 R19.2
NetR20_1: R20.1 U9.2 U9.6 | length 16.1
  Bottom Layer w0.254: U9.6 91.355,122.81 U9.2 95.175,125.35 97.825,122.7 R20.1
NetR25_1: R25.1 R26.2 U13.1 | length 31.3
  Top Layer w2: R26.2 12.125,93.9 ; U13.1 12.125,93.9 ; R25.1 30.3,93.149 29.128,94.321 28.866,94.321 27.546,95.641 27.546,96.353 26.374,97.525 15.75,97.525 12.125,93.9
NetR25_2: R25.2 R28.1 U13.6 | length 18.6
  Top Layer w2: U13.6@19.745,85.639 21.586,85.639 24.458,82.767 29.933,82.767 R25.2 28.375,80.475 R28.1@24.382,80.475
NetR26_1: R26.1 R29.2 R30.2 U13.2 | length 15.1
  Top Layer w2.5: R30.2 4.237,78.471 4.237,83.654 R29.2 8.225,87.642 R26.1 8.673,88.215 U13.2
NetR27_1: R27.1 R28.2 U13.7 | length 22
  Top Layer w2: U13.7 19.781,88.251 20.782,88.251 21.239,88.708 22.75,88.708 R28.2 27.367,90.508 35.45,82.425 R27.1
NetR30_1: R30.1 U14.1 U14.2 | length 12.8
  Top Layer w2.5: R30.1 5.755,68.4 U14.1 12.325,59.925
NetR31_2: R31.2 R33.2 U14.3 | length 27.9
  Top Layer w2.5: U14.3 7.724,56.75 7.575,56.601 7.575,43.635 7.85,43.36 R33.2 7.933,43.242 17.217,43.242 R31.2
NetU5_1: U5.1 Y1.2 | length 7.6
  Top Layer w1: Y1.2 42.019,70.685 42.664,71.33 U5.1
NetU5_2: U5.2 Y1.1 | length 7.6
  Top Layer w1: Y1.1 42.55,68.45 U5.2@49.275,68.45
NetU6_3: U6.3 U7.14 | length 31.9
  Top Layer w1.5: v1(12.8,115.625) 12.8,130.319 14.981,132.5 U7.14
  Bottom Layer w1.5: v1(12.8,115.625) 12.925,115.5 12.925,107.935 U6.3
NetU6_5: U6.5 U7.13 | length 33.8
  Top Layer w2: U7.13 15.357,129.96 21.95,123.367 21.95,102.497 23.122,101.325 24.615,101.325 U6.5
Polygot_Turtle_On: R3.2 U1.14 U2.6 | length 51.7
  Top Layer w2.2: v1(117.375,34.75) 123.97,34.75 125.909,36.689 125.909,36.859 v1(127.75,38.7)
  Bottom Layer w2.2: U2.6 111.541,37.564 111.541,37.128 113.419,35.25 116.875,35.25 v1(117.375,34.75) ; R3.2 132.355,34.528 142.556,34.528 144.02,33.063 U1.14
RCT_SCL: U2.28 U5.6 | length 110.6
  Top Layer w0.4: U5.6 65.345,57.8 93.356,57.8 96.256,54.9 124.444,54.9 137.736,41.608 137.736,40.48 126.956,29.7 U2.28
RESET_Display: U2.14 U4.4 | length 66.7
  Bottom Layer w2.5: U2.14 90.785,41.71 116.315,67.24 U4.4
RTC_SDA: U2.27 U5.5 | length 102.6
  Top Layer w0.4: U5.5 63.93,56.675 93.556,56.675 96.845,53.386 122.353,53.386 132.524,43.216 132.524,40.499 121.935,29.91 121.475,29.91 U2.27
TURTLE_RX_IN: U1.8 U2.3 | length 19.1
  Bottom Layer w2: U2.3 118.725,37.706 121.631,34.8 126.625,34.8 128.1,33.325 128.1,26.64 U1.8
TURTLE_TX_OUT: U1.7 U2.2 | length 10
  Top Layer w2: U2.2 121.265,40.028 122.437,41.2 U1.7
pads on no net: FID1.F_T FID2.F_T FID3.F_T FID4.F_T FID5.F_T FID6.F_T PB1.3 PB1.4 PB2.3 PB2.4 PB3.3 PB3.4 PB4.3 PB4.4 PB5.3 PB5.4 PB6.3 PB6.4 SW1.B1 SW1.B2 U1.1 U1.2 U1.3 U1.4 U1.5 U1.6 U1.9 U1.10 U1.11 U1.12 U2.20 U4.1 U4.3 U4.5 U4.7 U4.8 U4.9 U4.10 U4.11 U4.12 U4.13 U4.14 U5.3 U5.7 U7.1 U7.2 U7.4 U7.5 U7.9 U7.10 U7.12 U7.15 U8.5 U8.6 U8.7 U9.1 U9.5 U9.8 U10.1 U10.5 U10.8 U11.1 U11.5 U11.8 U12.1 U12.5 U12.8 U14.5 U14.6 U14.7

## Silkscreen, mask and mechanical layers (free items; w line width, h text height)
Top Overlay:
  text "ENGG2800 - g37 V2" at 46.254,3.462 h1.52